# EAGLE board RingLight (EAGLE 9.6.2)
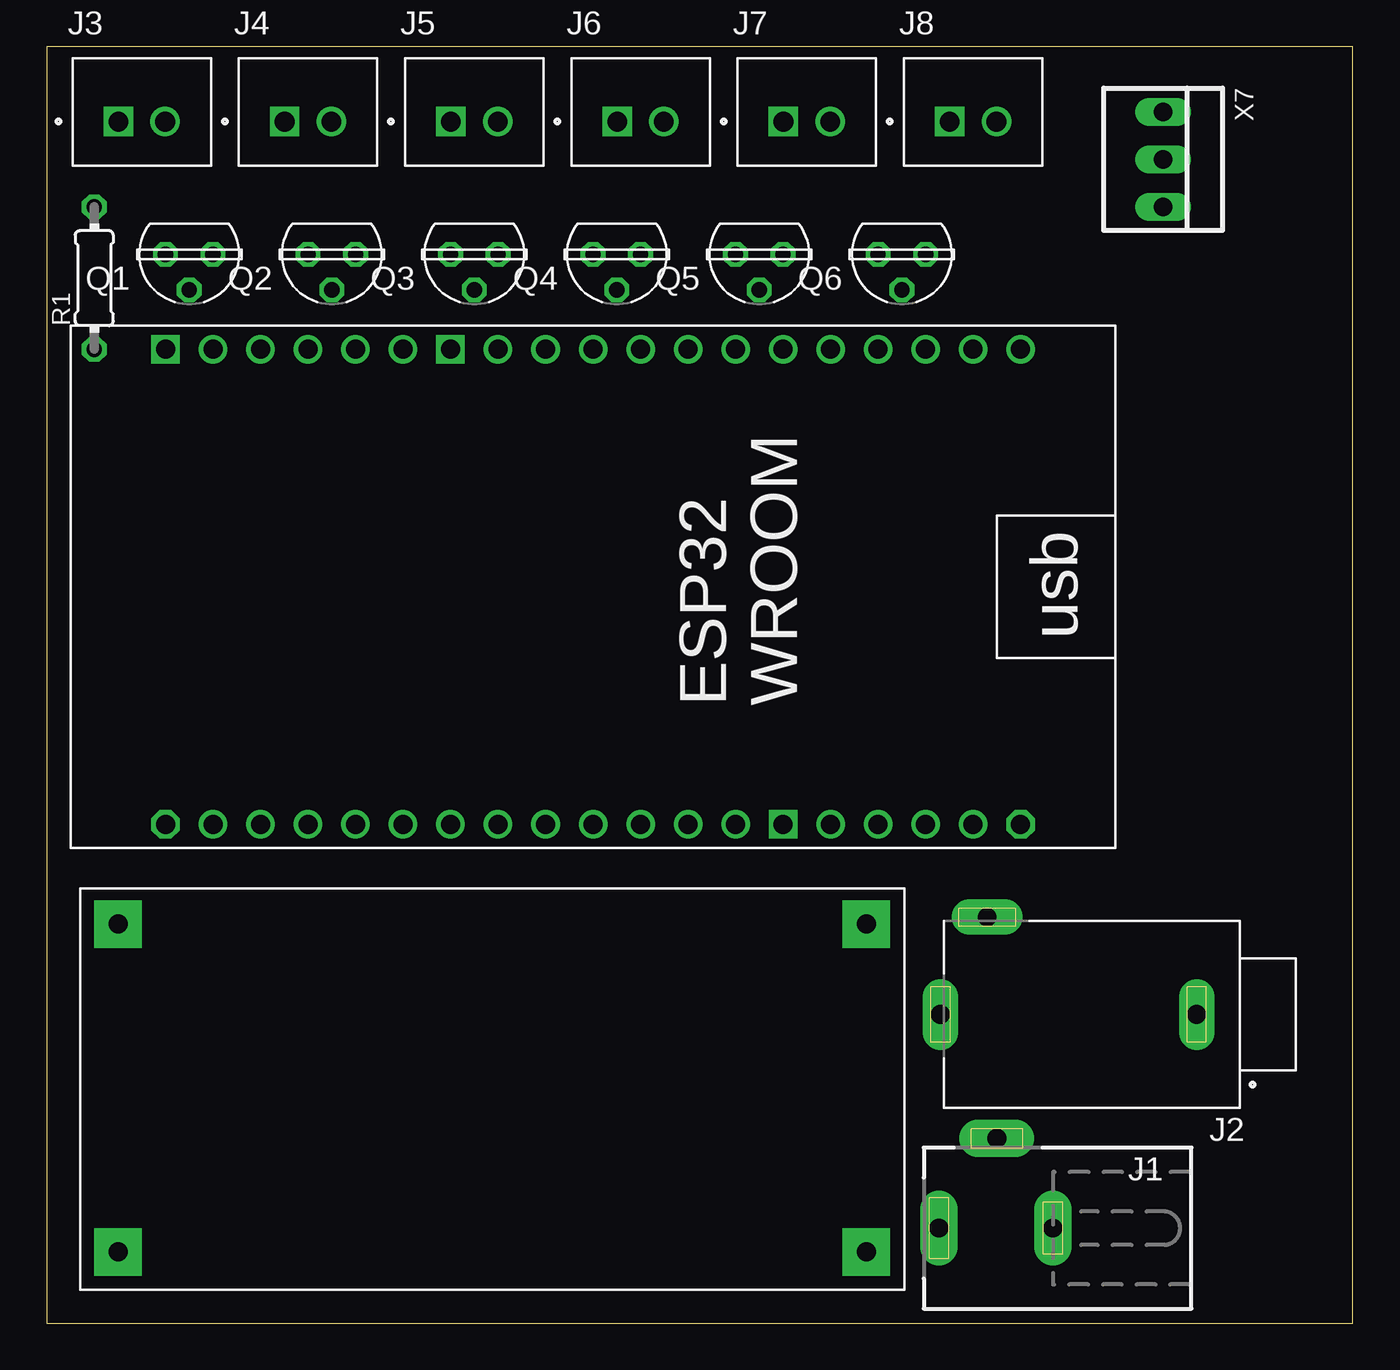
[diagram p0: board, top side]
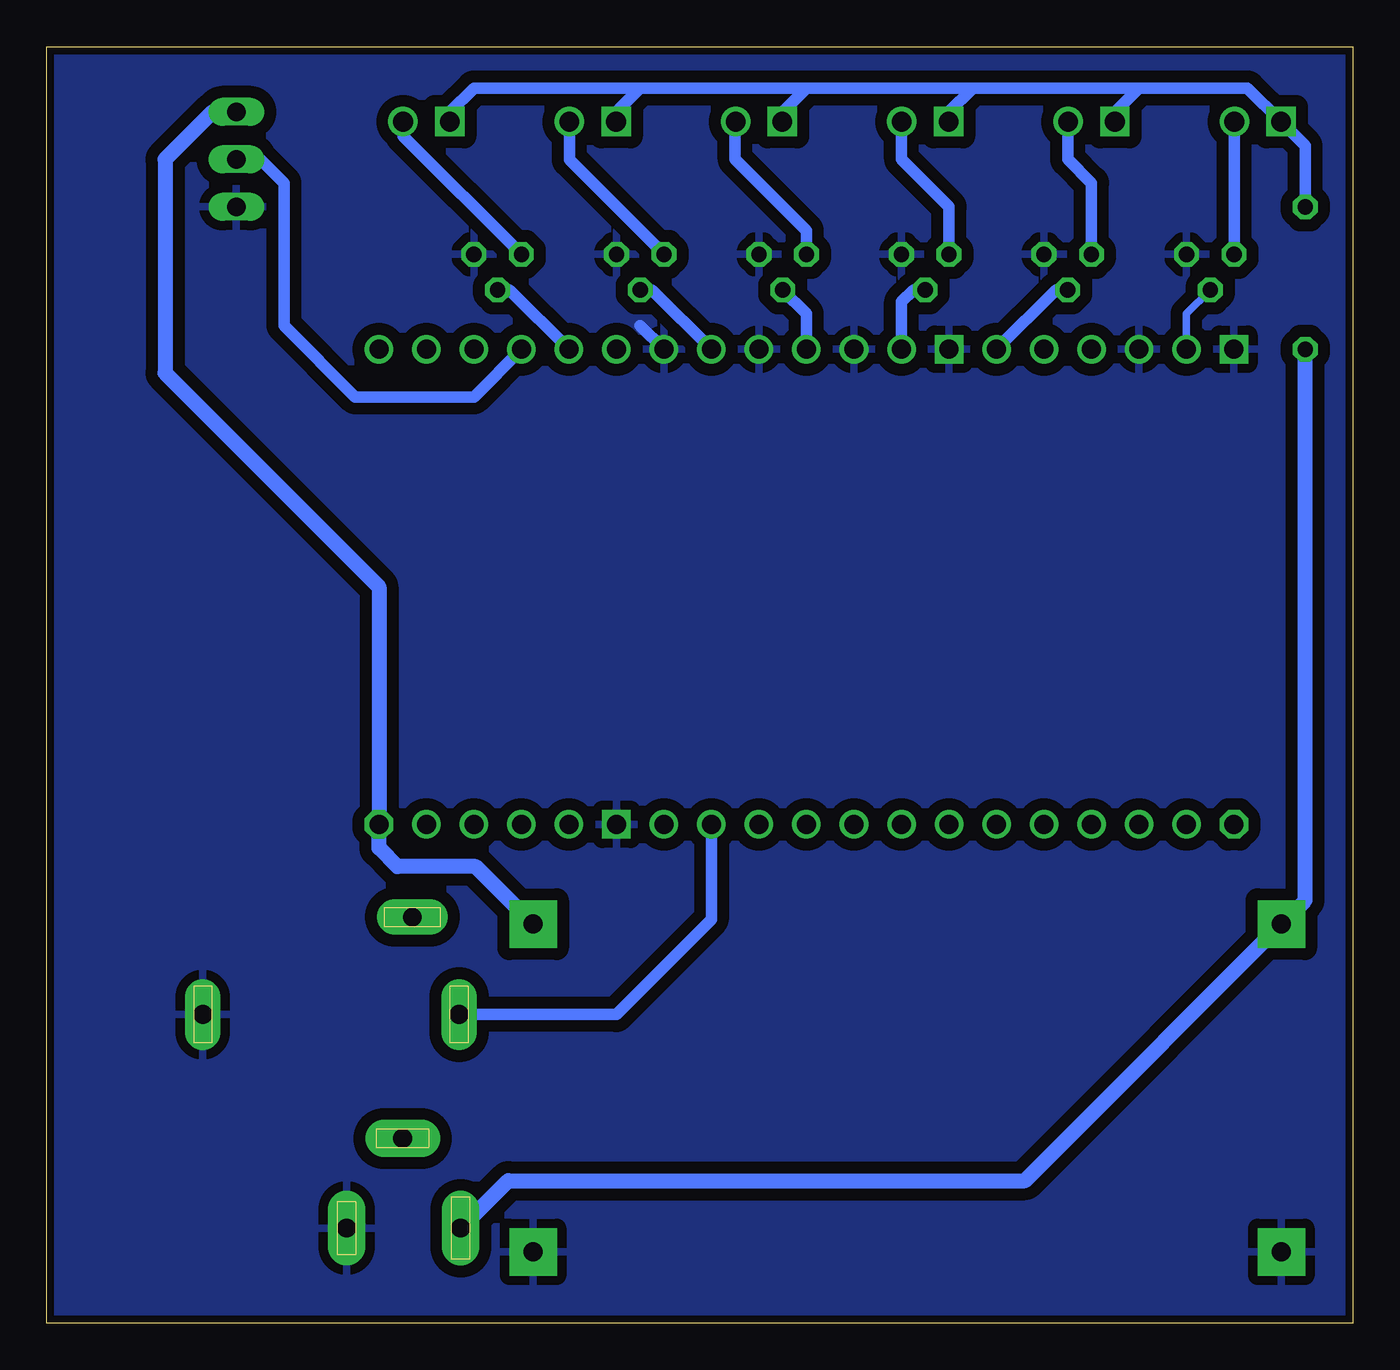
[diagram p1: board, bottom side, seen from below]

Size 69.83 x 68.25 mm. Coordinates in mm from the lower left corner, seen from the top.
Outline: 0,0 69.83,0 69.83,68.25 0,68.25 0,0
Copper layers (1*16): Top 0.035mm / dielectric 1.5mm / Bottom 0.035mm
Design rules "DRC_Basic (1)": minimum track width 15mil, minimum drill 0.3mm, track to track 25mil, track to pad 25mil, pad to pad 25mil, via to via 25mil, smd to smd 6mil, copper to edge 12mil, drill to drill 12mil, minimum pad ring 10mil, minimum via ring 8mil, stop-mask expansion 4mil, vias tented up to drill 0mil, thermal gap 20mil

## Footprints (pad centres in the part's own frame; a part is rotated, then mirrored left to right if it is on the bottom)
DCJ0303 = drill 1 pad 2 long: 1 0,3.1; 2 4.8,0; 3 0,-3
CUI_MJ-3536N = drill 1 pad 1.9 long: 1 -5.6,0; 2 8.1,0; 3 5.6,-5.2
JST_B2B-XH-A(LF)(SN) = drill 1.05 square: 1 -1.25,-0.525 | drill 1.05: 2 1.25,-0.525
TO237 = drill 0.813 octagon: 1 1.27,0; 2 0,1.905; 3 -1.27,0
0204/7 = drill 0.813 octagon: 1 -3.81,0; 2 3.81,0
LM2596DC-DC = drill 1.016 pad 2.54 square: IN+ 0,17.526; IN- 0,0; OUT+ 40.005,17.526; OUT- 40.005,0
ESP32-WROOM-32 = drill 1.016 octagon: P$1 1.27,5.08; P$19 1.27,50.8 | drill 1.016: P$2 1.27,7.62; P$3 1.27,10.16; P$4 1.27,12.7; P$5 1.27,15.24; P$7 1.27,20.32; P$8 1.27,22.86; P$9 1.27,25.4; P$10 1.27,27.94; P$11 1.27,30.48; P$12 1.27,33.02; P$13 1.27,35.56; P$14 1.27,38.1; P$15 1.27,40.64; P$16 1.27,43.18; P$17 1.27,45.72; P$18 1.27,48.26; P$20 26.67,5.08; P$21 26.67,7.62; P$22 26.67,10.16; P$23 26.67,12.7; P$24 26.67,15.24; P$25 26.67,17.78; P$26 26.67,20.32; P$27 26.67,22.86; P$28 26.67,25.4; P$29 26.67,27.94; P$30 26.67,30.48; P$31 26.67,33.02; P$33 26.67,38.1; P$34 26.67,40.64; P$35 26.67,43.18; P$36 26.67,45.72; P$37 26.67,48.26 | drill 1.016 square: P$6 1.27,17.78; P$32 26.67,35.56; P$38 26.67,50.8
22-23-2031 = drill 1 long: 1 -2.54,0; 2 0,0; 3 2.54,0

## Placement (x,y rotation side)
J1  [DCJ0303]  50.8,5.08 90 top
J2  MJ-3536N  [CUI_MJ-3536N]  55.88,16.51 180 top
J3  B2B-XH-A(LF)(SN)  [JST_B2B-XH-A(LF)(SN)]  5.08,64.77 0 top
J4  B2B-XH-A(LF)(SN)  [JST_B2B-XH-A(LF)(SN)]  13.97,64.77 0 top
J5  B2B-XH-A(LF)(SN)  [JST_B2B-XH-A(LF)(SN)]  22.86,64.77 0 top
J6  B2B-XH-A(LF)(SN)  [JST_B2B-XH-A(LF)(SN)]  31.75,64.77 0 top
J7  B2B-XH-A(LF)(SN)  [JST_B2B-XH-A(LF)(SN)]  40.64,64.77 0 top
J8  B2B-XH-A(LF)(SN)  [JST_B2B-XH-A(LF)(SN)]  49.53,64.77 0 top
Q1  VN2222KM  [TO237]  7.62,57.15 180 top
Q2  VN2222KM  [TO237]  15.24,57.15 180 top
Q3  VN2222KM  [TO237]  22.86,57.15 180 top
Q4  VN2222KM  [TO237]  30.48,57.15 180 top
Q5  VN2222KM  [TO237]  38.1,57.15 180 top
Q6  VN2222KM  [TO237]  45.72,57.15 180 top
R1  [0204/7]  2.54,55.88 90 top
U$2  BUCK-CONVERTER  [LM2596DC-DC]  3.81,3.81 0 top
U$4  SHOP_ESP  [ESP32-WROOM-32]  57.15,25.4 90 top
X7  22-23-2031  [22-23-2031]  59.69,62.23 270 top

## Library data of the parts
J1 = con-jack; OC_FARNELL: unknown; OC_NEWARK: unknown
J2 = MJ-3536N; AVAILABILITY: In Stock; CHECK_PRICES: https://www.snapeda.com/parts/MJ-3536N/CUI+Devices/view-part/?ref=eda; CUI_PURCHASE_URL: https://www.cuidevices.com/product/interconnect/connectors/audio-connectors/jacks/mj-3536n?utm_source=snapeda.com&utm_medium=referral&utm_campaign=snapedaBOM; DESCRIPTION: 3.5 mm, Mono, Right Angle, Through Hole, 2 Conductors, 1 Internal Switch, Audio Jack Connector; MF: CUI Devices; MP: MJ-3536N; PACKAGE: None; PRICE: None; PURCHASE-URL: https://www.snapeda.com/api/url_track_click_mouser/?unipart_id=559067&manufacturer=CUI Devices&part_name=MJ-3536N&search_term=mj-3536n; SNAPEDA_LINK: https://www.snapeda.com/parts/MJ-3536N/CUI+Devices/view-part/?ref=snap
J3-J8 = B2B-XH-A_LF__SN_; AVAILABILITY: In Stock; CHECK_PRICES: https://www.snapeda.com/parts/B2B-XH-A(LF)(SN)/JST+Sales+America+Inc./view-part/?ref=eda; DESCRIPTION: Connector Header Through Hole 2 position 0.098 (2.50mm); MF: JST Sales; MP: B2B-XH-A(LF)(SN); PACKAGE: None; PRICE: None; SNAPEDA_LINK: https://www.snapeda.com/parts/B2B-XH-A(LF)(SN)/JST+Sales+America+Inc./view-part/?ref=snap
Q1-Q6 = transistor-fet
R1 = rcl; SPICEPREFIX: R
U$2 = buck
U$4 = ElcPartsLibrary
X7 = con-molex; MF: MOLEX; MPN: 22-23-2031; OC_FARNELL: 1462950; OC_NEWARK: 30C0862

## Nets
3V3: U$4.P$19
5V: U$2.OUT+ U$4.P$1 X7.1
24V: J1.1 R1.1 U$2.IN+
CMD: U$4.P$2
GND: J1.3 J2.1 Q1.3 Q2.3 Q3.3 Q4.3 Q5.3 Q6.3 U$2.IN- U$2.OUT- U$4.P$6 U$4.P$26 U$4.P$28 U$4.P$30 U$4.P$32 U$4.P$36 U$4.P$38 X7.3
IN: J3.1 J4.1 J5.1 J6.1 J7.1 J8.1 R1.2
N$1: J3.2 Q1.1
N$2: J4.2 Q2.1
N$3: J5.2 Q3.1
N$4: J6.2 Q4.1
N$5: J7.2 Q5.1
N$6: Q1.2 U$4.P$37
N$7: U$4.P$23 X7.2
N$8: Q2.2 U$4.P$33
N$9: Q3.2 U$4.P$31
N$10: Q4.2 U$4.P$29
N$11: Q5.2 U$4.P$27
N$12: Q6.2 U$4.P$24
N$13: J2.2 U$4.P$8
N$14: J8.2 Q6.1

## Tracks (layer width: path | path; a pad name or v marks a point on that pad's centre or on a via)
5V
  Bottom 0.813: U$2.OUT+ 46.9,24.42 51.09,24.42 52.07,25.4 U$4.P$1 52.07,39.37 63.5,50.8 63.5,62.23 62.23,63.5 60.96,64.77 X7.1
24V
  Bottom 0.813: J1.1 45.16,7.62 17.53,7.62 16.38,8.76 U$2.IN+ 2.54,22.61 R1.1
GND
  Bottom 0.61: U$4.P$26 38.1,53.34
  pour Bottom (isolate 0.406): 0,0 69.85,0 69.85,68.58 0,68.58
IN
  Bottom 0.61: R1.2 2.54,62.95 J3.1 5.62,66.04 11.43,66.04 | 11.43,66.04 20.32,66.04 | 20.32,66.04 29.21,66.04 | 29.21,66.04 38.1,66.04 | 38.1,66.04 46.99,66.04 48.28,64.75 J8.1 | 11.43,66.04 12.72,64.75 J4.1 | 20.32,66.04 21.61,64.75 J5.1 | 29.21,66.04 30.5,64.75 J6.1 | 38.1,66.04 39.39,64.75 J7.1
N$1
  Bottom 0.61: Q1.1 6.33,57.17 J3.2
N$2
  Bottom 0.61: Q2.1 13.97,60.96 15.24,62.23 15.24,64.22 J4.2
N$3
  Bottom 0.61: Q3.1 21.59,59.69 24.13,62.23 24.13,64.22 J5.2
N$4
  Bottom 0.61: Q4.1 29.21,58.42 33.02,62.23 33.02,64.22 J6.2
N$5
  Bottom 0.61: Q5.1 41.89,62.21 J7.2
N$6
  Bottom 0.406: U$4.P$37 8.89,53.98 Q1.2
N$7
  Bottom 0.61: U$4.P$23 46.99,49.53 53.34,49.53 57.15,53.34 57.15,60.96 58.42,62.23 X7.2
N$8
  Bottom 0.61: U$4.P$33 15.88,55.24 Q2.2
N$9
  Bottom 0.61: U$4.P$31 24.13,54.61 23.5,55.24 Q3.2
N$10
  Bottom 0.61: U$4.P$29 29.21,53.98 Q4.2
N$11
  Bottom 0.61: U$4.P$27 37.47,55.24 Q5.2
N$12
  Bottom 0.61: U$4.P$24 45.09,55.24 Q6.2
N$13
  Bottom 0.61: U$4.P$8 34.29,21.59 39.37,16.51 J2.2
N$14
  Bottom 0.61: Q6.1 50.78,63.48 J8.2